# EAGLE board MiniWhipNext (EAGLE 8.6.0)
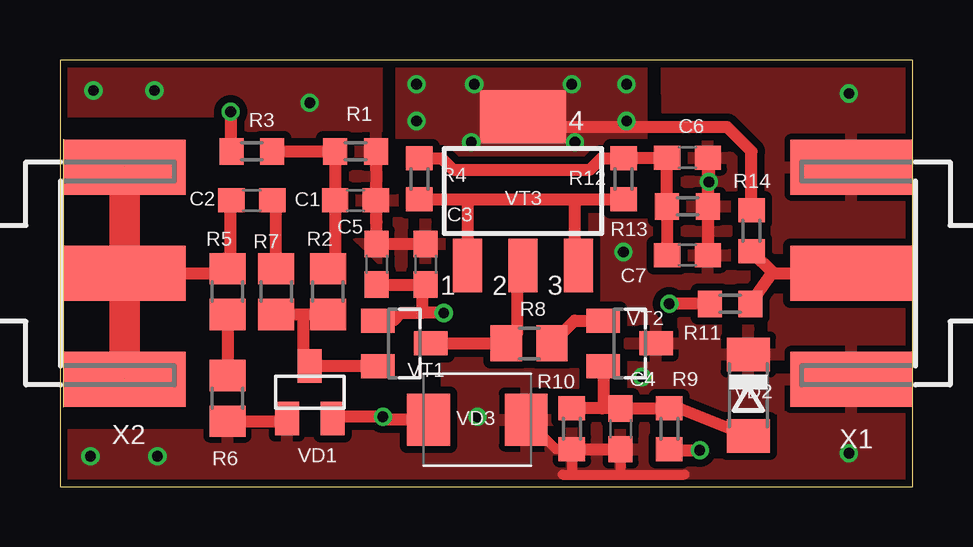
[diagram p0: board, top side]
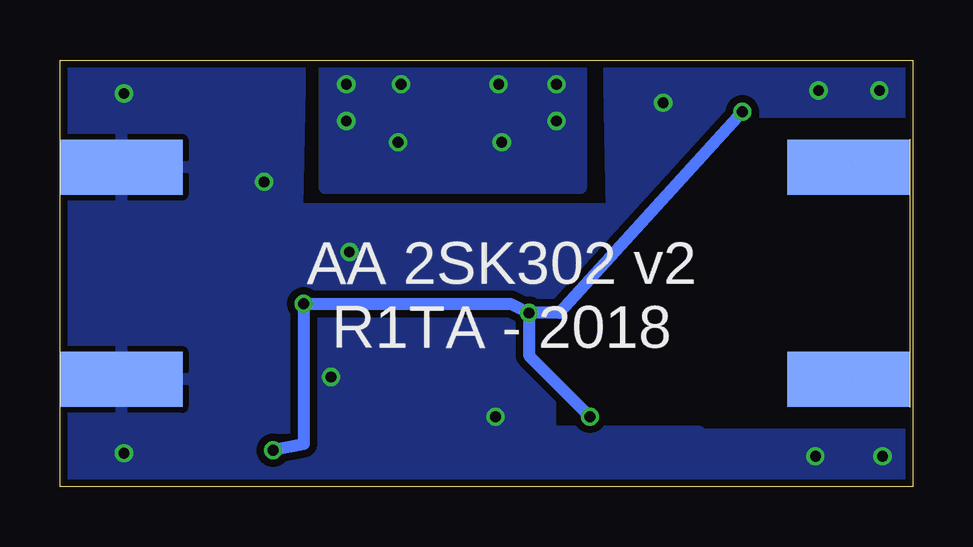
[diagram p1: board, bottom side, seen from below]

Size 35.56 x 17.78 mm. Coordinates in mm from the lower left corner, seen from the top.
Outline: 0,0 35.56,0 35.56,17.78 0,17.78 0,0
Copper layers (1*16): Top 0.035mm / dielectric 1.5mm / Bottom 0.035mm
Design rules "SeeedStudio_2layer_DRU_no_angle_20140221 *": minimum track width 6mil, minimum drill 12mil, track to track 6mil, track to pad 6mil, pad to pad 6mil, via to via 6mil, smd to smd 0mil, copper to edge 10mil, drill to drill 10mil, minimum pad ring 10mil, minimum via ring 6mil, stop-mask expansion 2mil, vias tented up to drill 100mil, thermal gap 10mil
Net classes: 0 default: clearance 0.205 mm

## Footprints (pad centres in the part's own frame; a part is rotated, then mirrored left to right if it is on the bottom)
C0603 = smd 1.1 x 1: 1 -0.85,0; 2 0.85,0
R0603 = smd 1 x 1.1: 1 -0.85,0; 2 0.85,0
R0805 = smd 1.3 x 1.5: 1 -0.95,0; 2 0.95,0
SOT23 = smd 1 x 1.4: 1 -0.95,-1.1; 2 0.95,-1.1; 3 0,1.1
SOD80C = smd 1.4 x 1.8: A 1.7,0; C -1.7,0
SMBJ = smd 1.78 x 2.16: A 2.04,0; C -2.03,0
SOT223 = smd 1.219 x 2.235: 1 -2.311,-3.099; 2 0,-3.099; 3 2.311,-3.099 | smd 3.6 x 2.2: 4 0,3.099
J502-ND-142-0701-801/806 = smd 5.08 x 2.286: 1 2.565,0; G@1 2.565,4.42; G@2 2.565,-4.42 | smd 5.08 x 2.286 bottom: G@3 2.565,4.42; G@4 2.565,-4.42

## Placement (x,y rotation side)
C1  100n  [C0603]  12.32,11.94 180 top
C2  100n  [C0603]  8,11.94 180 top
C3  10n  [C0603]  15.24,9.27 270 top
C4  100n  [C0603]  23.37,2.41 270 top
C5  2.2 uF  [C0603]  13.21,9.27 270 top
C6  10n  [C0603]  26.16,13.72 0 top
C7  2.2 uF  [C0603]  26.16,9.65 0 top
R1  27K  [R0603]  12.32,13.97 0 top
R2  3.6M  [R0805]  11.18,8.13 270 top
R3  27K  [R0603]  8,13.97 180 top
R4  56  [R0603]  14.99,12.83 270 top
R5  5.6M  [R0805]  6.99,8.13 270 top
R6  5.6M  [R0805]  6.99,3.68 270 top
R7  150  [R0805]  9.02,8.13 90 top
R8  33  [R0805]  19.56,5.97 0 top
R9  2.2M  [R0603]  25.4,2.41 270 top
R10  68K  [R0603]  21.34,2.41 90 top
R11  51  [R0603]  27.94,7.62 0 top
R12  56  [R0603]  23.5,12.83 270 top
R13  62  [R0603]  26.16,11.68 180 top
R14  51  [R0603]  28.83,10.67 90 top
VD1  BAV99  [SOT23]  10.41,3.94 0 top
VD2  1N4148  [SOD80C]  28.7,3.81 270 top
VD3  SMBJ 13.0  [SMBJ]  17.4,2.79 0 top
VT1  2SK302SOT23  [SOT23]  14.35,5.97 270 top
VT2  2SK302SOT23  [SOT23]  23.75,5.97 270 top
VT3  BFG591  [SOT223]  19.3,12.32 0 top
X1  SMA-142-0701-801/806  [J502-ND-142-0701-801/806]  35.56,8.89 180 top
X2  SMA-142-0701-801/806  [J502-ND-142-0701-801/806]  0.13,8.89 0 top

## Library data of the parts
C1-C7 R1-R14 = resistor
VD1 = SparkFun-DiscreteSemi; PROD_ID: DIO-10647
VD2 VD3 = diode
VT1 VT2 = transistor-fet-my
VT3 = transistor-npn-my
X1 X2 = con-coax; MF: JOHNSON COMPONENTS; MPN: 142-0701-801; OC_FARNELL: 1608592; OC_NEWARK: 90F2624

## Nets
+12V: C3.2 C5.2 R3.2 R9.2 R11.1 VD1.2 VD3.C VT1.1
GND: C1.1 C3.1 C4.2 C5.1 C6.2 C7.2 R1.2 R6.2 R10.1 R13.1 VD1.1 VD2.C VD3.A VT2.3 X1.G@1 X1.G@2 X1.G@3 X1.G@4
IN: C2.2 R5.1 X2.1 X2.G@1 X2.G@2 X2.G@3 X2.G@4
N$1: C1.2 R1.1 R2.1 R3.1
N$4: R14.2 VT3.4
N$5: R2.2 R7.1 VD1.3 VT1.2
N$6: C6.1 C7.1 R4.1 R12.1 R13.2
N$7: R4.2 R12.2 VT3.1 VT3.3
N$9: R8.2 VT2.1
N$10: C4.1 R9.1 R10.2 VD2.A VT2.2
N$11: C2.1 R7.2
N$12: R5.2 R6.1
OUT: R11.2 R14.1 X1.1
PREAMP: R8.1 VT1.3 VT3.2

## Tracks (layer width: path | path; a pad name or v marks a point on that pad's centre or on a via)
+12V  (via drill 0.45)
  Top 0.508: v16,7.24 15.11,7.24 | 15.11,7.24 15.11,8.17 C3.2 C5.2 | VT1.1 13.9,6.92 14.22,7.24 15.11,7.24 | VD3.C 13.59,2.79 v13.46,2.92 11.45,2.92 VD1.2 | R11.1 v25.4,7.62 | v7.11,15.62 7.11,14.39 R3.2 | R9.2 25.57,1.52 v26.67,1.52
  Bottom 0.508: v16,7.24 16.76,7.62 v25.4,7.62 25.4,1.78 v26.67,1.52 | v7.11,15.62 14.73,7.24 v16,7.24 | v16,7.24 16,5.46 v13.46,2.92
GND  (via drill 0.45)
  Top 0.406: 20.95,0.51 21.34,0.51 | 21.34,0.51 23.37,0.51 | 23.37,0.51 26.04,0.51 | 21.34,0.51 R10.1 20.67,1.56 VD3.A | C4.2 23.37,0.51
  Top 0.508: C7.2 R13.1 C6.2 27.05,13.68 v27.05,12.7 | R1.2 C1.1 13.17,10.16 C5.1 C3.1 | R6.2 9.36,2.73 VD1.1 | R10.1 C4.2
  other vias: 1.4,16.51 32.89,16.38 32.89,1.4 1.27,1.27 23.5,9.78 17.4,2.92 10.41,16 24.26,4.57 3.94,16.51 4.06,1.27
  pour Top (isolate 0.305): 0,17.78 13.21,17.78 13.21,12.83 25.4,12.83 25.27,17.53 35.43,17.65 35.56,17.53 35.56,0.13 0.25,0.13 0.25,2.16 16.13,2.16 16.13,6.73 12.7,10.16 6.73,15.62 0,15.62
  pour Bottom (isolate 0.305): 12.7,17.78 12.57,11.56 25.53,11.56 25.65,11.68 25.53,17.65 35.43,17.65 35.43,0 0,0 0,2.16 8.89,2.16 8.89,2.29 15.11,2.29 15.11,7.62 12.95,7.62 12.95,10.29 10.41,10.29 10.29,10.41 10.29,12.32 10.41,12.45 6.86,12.45 6.86,15.62 0.13,15.62 0.13,17.65
IN  (2 unrouted)
  Top 0.508: 6.92,9.53 R5.1 7.11,9.53 | 7.11,9.53 7.11,11.85 C2.2 | X2.1 6.48,8.89 7.11,9.53
  Top 1.27: X2.G@3 X2.1 X2.G@4
N$1
  Top 0.508: R3.1 R1.1 C1.2 11.47,9.24 R2.1
N$4  (via drill 0.45)
  Top 0.508: R14.2 28.83,13.97 27.81,14.99 19.74,14.99 VT3.4
  other vias: 14.86,15.24 14.86,16.76 23.62,16.76 23.62,15.24 17.27,16.76 21.34,16.76 17.14,14.35 21.46,14.35
  pour Top (isolate 0.305, no thermals): 14.22,17.53 14.22,13.72 24.26,13.72 24.26,17.53
  pour Bottom (isolate 0.305): 13.84,17.65 13.84,12.45 24.51,12.45 24.51,17.65
N$5
  Top 0.508: R7.1 10.16,7.18 | 10.16,7.18 R2.2 | 10.16,7.18 10.16,5.29 VD1.3 13.23,5.04 VT1.2
N$6
  Top 0.508: C7.1 R13.2 C6.1 23.53,13.72 R12.1 22.57,13.68 22.1,13.21 16.38,13.21 15.91,13.68 R4.1
N$7
  Top 0.508: R4.2 17.02,11.98 | 17.02,11.98 21.46,11.98 | 21.46,11.98 R12.2 | VT3.1 17.02,9.25 17.02,11.98 | VT3.3 21.46,9.37 21.46,11.98
N$9
  Top 0.508: R8.2 21.46,6.92 VT2.1
N$10
  Top 0.508: 22.61,3.26 C4.1 R9.1 25.77,3.26 VD2.A | 22.61,3.26 R10.2 | VT2.2 22.65,3.31 22.61,3.26
N$11
  Top 0.508: R7.2 9.02,11.77 C2.1
N$12
  Top 0.508: R5.2 R6.1
OUT
  Top 0.508: X1.1 31.62,8.51 31.56,8.57 | R11.2 29.68,8.89 X1.1 | R14.1 29.76,8.89 X1.1
PREAMP
  Top 0.508: VT1.3 R8.1 18.67,5.97 19.05,6.35 19.05,8.97 VT3.2

## Text on the board
bNames: AA 2SK302 v2 / R1TA - 2018